# EAGLE board rat (EAGLE 6.3)
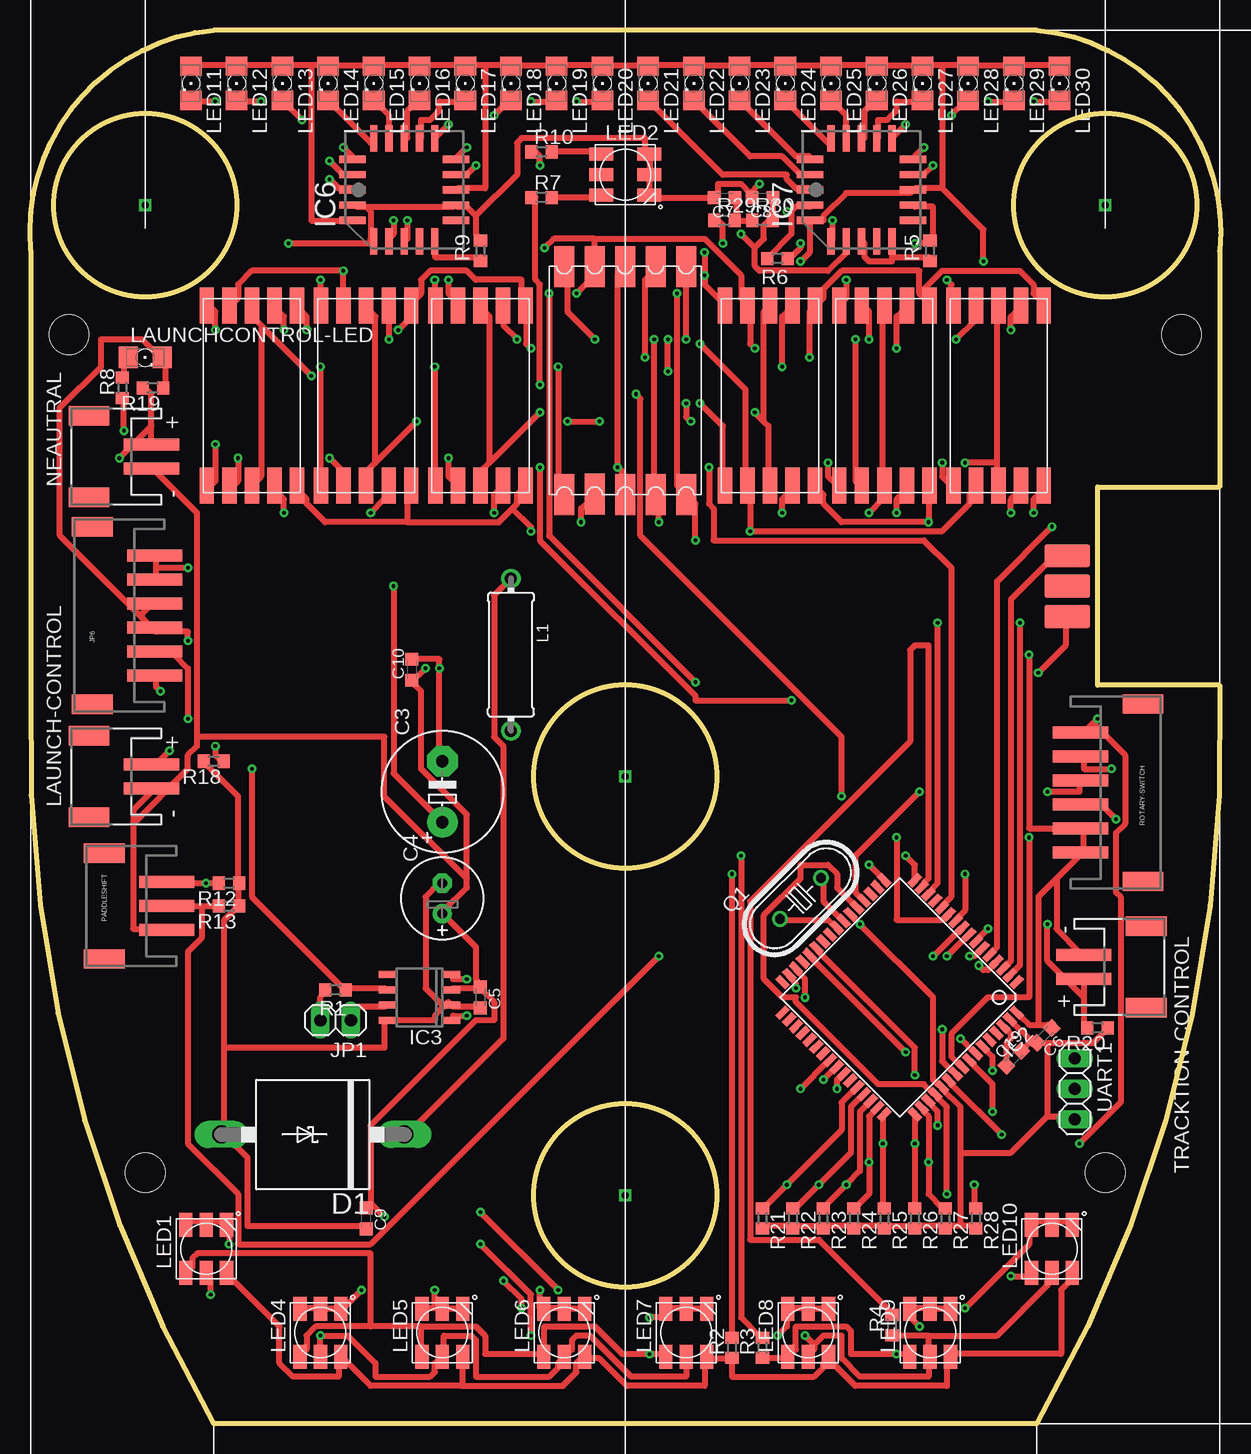
[diagram p0: board, top side]
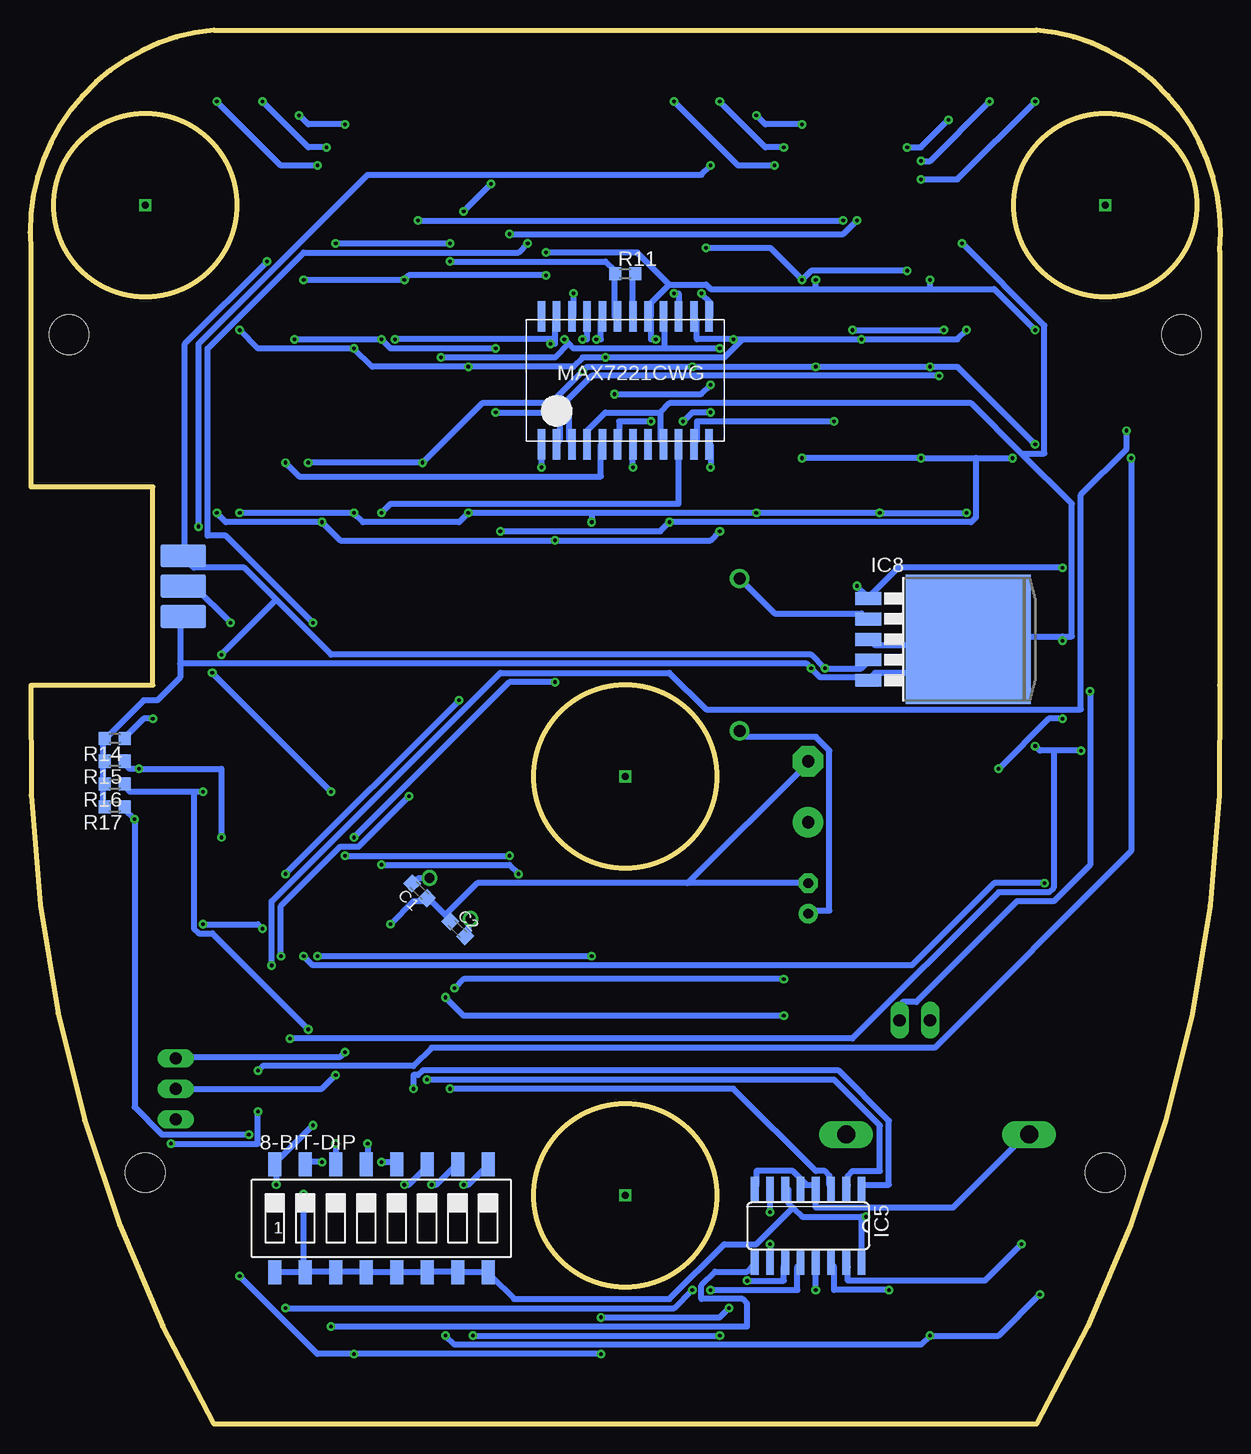
[diagram p1: board, bottom side, seen from below]

Size 99.21 x 116.2 mm. Coordinates in mm from the lower left corner, seen from the top.
Outline: 83.89,116.2 15.31,116.2 arc90 0.07,97.79 0.07,61.59 arc32 15.31,0 83.89,0 arc32 99.13,61.59 88.97,61.59 88.97,78.1 99.13,78.1 99.13,97.79 arc90 83.89,116.2
Outline: circle at 9.6,101.6 radius 7.62
Outline: circle at 89.61,101.6 radius 7.62
Outline: circle at 49.6,53.98 radius 7.62
Outline: circle at 49.6,19.05 radius 7.62
Copper layers (1*16): Top 0.035mm / dielectric 1.5mm / Bottom 0.035mm
Design rules "default *": minimum track width 19mil, minimum drill 12mil, track to track 6mil, track to pad 6mil, pad to pad 6mil, via to via 6mil, smd to smd 6mil, copper to edge 20mil, drill to drill 8mil, minimum pad ring 10mil, minimum via ring 8mil, stop-mask expansion 4mil, vias tented up to drill 0mil, thermal gap 10mil

## Footprints (pad centres in the part's own frame; a part is rotated, then mirrored left to right if it is on the bottom)
SMS-008 = smd 1.092 x 2.007: 1 -8.89,-4.496; 2 -6.35,-4.496; 3 -3.81,-4.496; 4 -1.27,-4.496; 5 1.27,-4.496; 6 3.81,-4.496; 7 6.35,-4.496; 8 8.89,-4.496; 9 8.89,4.496; 10 6.35,4.496; 11 3.81,4.496; 12 1.27,4.496; 13 -1.27,4.496; 14 -3.81,4.496; 15 -6.35,4.496; 16 -8.89,4.496
C0603K = smd 1.05 x 1.08: 1 -0.875,0; 2 0.875,0
E5-10,5 = drill 1.016 pad 2.54: + -2.54,0 | drill 1.016 pad 2.54 octagon: - 2.54,0
E2,5-7 = drill 0.813 pad 1.6: + -1.27,0 | drill 0.813 pad 1.6 octagon: - 1.27,0
P6T15 = drill 1.499 long: A 7.62,0; C -7.62,0
TQFP64 = smd 1.194 x 0.559: 1 -7.8,6; 2 -7.8,5.2; 3 -7.8,4.4; 4 -7.8,3.6; 5 -7.8,2.8; 6 -7.8,2; 7 -7.8,1.2; 8 -7.8,0.4; 9 -7.8,-0.4; 10 -7.8,-1.2; 11 -7.8,-2; 12 -7.8,-2.8; 13 -7.8,-3.6; 14 -7.8,-4.4; 15 -7.8,-5.2; 16 -7.8,-6; 33 7.8,-6; 34 7.8,-5.2; 35 7.8,-4.4; 36 7.8,-3.6; 37 7.8,-2.8; 38 7.8,-2; 39 7.8,-1.2; 40 7.8,-0.4; 41 7.8,0.4; 42 7.8,1.2; 43 7.8,2; 44 7.8,2.8; 45 7.8,3.6; 46 7.8,4.4; 47 7.8,5.2; 48 7.8,6 | smd 0.559 x 1.194: 17 -6,-7.8; 18 -5.2,-7.8; 19 -4.4,-7.8; 20 -3.6,-7.8; 21 -2.8,-7.8; 22 -2,-7.8; 23 -1.2,-7.8; 24 -0.4,-7.8; 25 0.4,-7.8; 26 1.2,-7.8; 27 2,-7.8; 28 2.8,-7.8; 29 3.6,-7.8; 30 4.4,-7.8; 31 5.2,-7.8; 32 6,-7.8; 49 6,7.8; 50 5.2,7.8; 51 4.4,7.8; 52 3.6,7.8; 53 2.8,7.8; 54 2,7.8; 55 1.2,7.8; 56 0.4,7.8; 57 -0.4,7.8; 58 -1.2,7.8; 59 -2,7.8; 60 -2.8,7.8; 61 -3.6,7.8; 62 -4.4,7.8; 63 -5.2,7.8; 64 -6,7.8
SO8 = smd 0.6 x 1.6: 1 -1.905,-2.6; 2 -0.635,-2.6; 3 0.635,-2.6; 4 1.905,-2.6; 5 1.905,2.6; 6 0.635,2.6; 7 -0.635,2.6; 8 -1.905,2.6
SO16 = smd 0.66 x 2.032: 1 -4.445,-3.073; 2 -3.175,-3.073; 3 -1.905,-3.073; 4 -0.635,-3.073; 5 0.635,-3.073; 6 1.905,-3.073; 7 3.175,-3.073; 8 4.445,-3.073; 9 4.445,3.073; 10 3.175,3.073; 11 1.905,3.073; 12 0.635,3.073; 13 -0.635,3.073; 14 -1.905,3.073; 15 -3.175,3.073; 16 -4.445,3.073
PLCC20S = smd 0.6 x 2.2: 1 0,4.3; 2 -1.27,4.3; 3 -2.54,4.3; 9 -2.54,-4.3; 10 -1.27,-4.3; 11 0,-4.3; 12 1.27,-4.3; 13 2.54,-4.3; 19 2.54,4.3; 20 1.27,4.3 | smd 2.2 x 0.6: 4 -4.3,2.54; 5 -4.3,1.27; 6 -4.3,0; 7 -4.3,-1.27; 8 -4.3,-2.54; 14 4.3,-2.54; 15 4.3,-1.27; 16 4.3,0; 17 4.3,1.27; 18 4.3,2.54
TO263-5 = smd 1.067 x 2.159: 1 -3.404,-5.791; 2 -1.702,-5.791; 3 0,-5.791; 4 1.702,-5.791; 5 3.404,-5.791 | smd 10.8 x 10.41: 6 0,2.54
1X02 = drill 1.016 long: 1 -1.27,0; 2 1.27,0
STAND-OFF = hole 3.302: 0,0
S6B_PH = smd 1 x 4.6: 1 -4.92,-2.7; 2 -2.92,-2.7; 3 -0.92,-2.7; 4 1.08,-2.7; 5 3.08,-2.7; 6 5.08,-2.7 | smd 1.6 x 3.4: NC1 -7.32,2.5; NC2 7.48,2.5
TFI0410 = drill 1 pad 1.6: 1 -6.35,0; 2 6.35,0
JST-PH-2-SMT-RA = smd 1 x 4.6: 1 1,-3.7; 2 -1,-3.7 | smd 1.6 x 3.4: NC1 -3.4,1.5; NC2 3.4,1.5
1206 = smd 1.6 x 1.803: A -1.422,0; C 1.422,0
RGBLED5050 = smd 2 x 1.1: 1 -2,1.7; 2 -2,0; 3 -2,-1.7; 4 2,-1.7; 5 2,0; 6 2,1.7
MAX7221 = smd 0.635 x 2.54: CLK 7.62,5.325; DIG0 -5.08,-5.325; DIG1 6.35,-5.325; DIG2 0,-5.325; DIG3 1.27,-5.325; DIG4 -3.81,-5.325; DIG5 5.08,-5.325; DIG6 -1.27,-5.325; DIG7 2.54,-5.325; DIN -6.35,-5.325; DOUT -6.35,5.325; GND -2.54,-5.325; GND1 3.81,-5.325; ISET 1.27,5.325; LOAD 7.62,-5.325; SEG_A 6.35,5.325; SEG_B 3.81,5.325; SEG_C -1.27,5.325; SEG_D -5.08,5.325; SEG_DP -3.81,5.325; SEG_E -2.54,5.325; SEG_F 5.08,5.325; SEG_G 2.54,5.325; VCC 0,5.325
S3B-PH = smd 1 x 4.6: 1 -2,-2.43; 2 0,-2.43; 3 2,-2.43 | smd 1.6 x 3.4: NC1 -4.4,2.77; NC2 4.4,2.77
HC49U70 = drill 0.813: 1 -2.413,0; 2 2.413,0
R0603 = smd 1 x 1.1: 1 -0.85,0; 2 0.85,0
REDSEGMENT = smd 1.2 x 3: A 1.88,7.5; B 3.76,7.5; C 1.88,-7.5; D -1.88,-7.5; DP 3.76,-7.5; E -3.76,-7.5; F -1.88,7.5; G -3.76,7.5; GND 0,-7.5; GND2 0,7.5
BIGSEVENSEGMENT = smd 1.7 x 3.4: A 2.54,9.475; B 5.08,9.475; C 2.54,-9.525; D -2.54,-9.475; DOT 5.08,-9.525; E -5.08,-9.525; F -2.54,9.475; G -5.08,9.475; GND 0,9.475; GND2 0,-9.525
ISP-HEADER = smd 3.81 x 1.93 bottom: GND 0,-2.54; MOSI 0,0; VDD 0,2.54 | smd 3.81 x 1.93: MISO 0,2.54; RST 0,-2.54; SCK 0,0
1X03 = drill 1.016 long: 1 -2.54,0; 2 0,0; 3 2.54,0

## Placement (x,y rotation side)
8-BIT-DIP  SWS008  [SMS-008]  69.92,17.14 0 bottom
C1  22pf  [C0603K]  66.75,44.45 135 bottom
C2  22pf  [C0603K]  63.57,41.27 315 bottom
C3  680 uf  [E5-10,5]  34.36,52.7 90 top
C4  220 uf  [E2,5-7]  34.36,43.81 90 top
C5  100nF  [C0603K]  37.54,35.56 270 top
C6  100nF  [C0603K]  84.53,32.38 225 top
C7  0.05uf  [C0603K]  57.86,102.23 180 top
C8  0.20uf  [C0603K]  61.03,102.23 180 top
C9  100nF  [C0603K]  28.01,17.14 270 top
C10  100nF  [C0603K]  31.82,62.86 90 top
C19  100nF  [C0603K]  81.99,30.48 45 top
D1  1n5824  [P6T15]  23.57,24.13 180 top
IC2  AT90CAN128  [TQFP64]  72.46,35.56 225 top
IC3  PCA82C250T  [SO8]  32.46,35.56 90 top
IC5  74LS138D  [SO16]  34.36,16.51 180 bottom
IC6  LM3914V  [PLCC20S]  31.19,102.87 90 top
IC7  LM3914V  [PLCC20S]  69.29,102.87 90 top
IC8  [TO263-5]  23.57,65.41 270 bottom
JP1  [1X02]  25.47,33.66 180 top
JP2  STAND-OFF  [STAND-OFF]  89.61,20.95 0 top
JP3  STAND-OFF  [STAND-OFF]  9.6,20.95 0 top
JP4  STAND-OFF  [STAND-OFF]  95.96,90.81 0 top
JP5  STAND-OFF  [STAND-OFF]  3.25,90.81 0 top
JP6  M06  [S6B_PH]  7.69,67.31 90 top
L1  33 uh  [TFI0410]  40.08,64.13 270 top
LAUNCH-CONTROL  [JST-PH-2-SMT-RA]  6.42,53.98 90 top
LAUNCHCONTROL-LED  [1206]  9.6,88.9 0 top
LED1  RGBLED5050  [RGBLED5050]  14.68,14.61 90 top
LED2  RGBLED5050  [RGBLED5050]  49.6,104.14 0 top
LED4  RGBLED5050  [RGBLED5050]  24.2,7.62 90 top
LED5  RGBLED5050  [RGBLED5050]  34.36,7.62 90 top
LED6  RGBLED5050  [RGBLED5050]  44.52,7.62 90 top
LED7  RGBLED5050  [RGBLED5050]  54.68,7.62 90 top
LED8  RGBLED5050  [RGBLED5050]  64.84,7.62 90 top
LED9  RGBLED5050  [RGBLED5050]  75,7.62 90 top
LED10  RGBLED5050  [RGBLED5050]  85.16,14.61 90 top
LED11  GREEN  [1206]  13.41,111.76 270 top
LED12  GREEN  [1206]  17.22,111.76 270 top
LED13  GREEN  [1206]  21.03,111.76 270 top
LED14  GREEN  [1206]  24.84,111.76 270 top
LED15  GREEN  [1206]  28.65,111.76 270 top
LED16  GREEN  [1206]  32.46,111.76 270 top
LED17  GREEN  [1206]  36.27,111.76 270 top
LED18  GREEN  [1206]  40.08,111.76 270 top
LED19  GREEN  [1206]  43.89,111.76 270 top
LED20  GREEN  [1206]  47.7,111.76 270 top
LED21  GREEN  [1206]  51.51,111.76 270 top
LED22  GREEN  [1206]  55.32,111.76 270 top
LED23  GREEN  [1206]  59.13,111.76 270 top
LED24  GREEN  [1206]  62.94,111.76 270 top
LED25  GREEN  [1206]  66.75,111.76 270 top
LED26  GREEN  [1206]  70.56,111.76 270 top
LED27  GREEN  [1206]  74.37,111.76 270 top
LED28  GREEN  [1206]  78.18,111.76 270 top
LED29  GREEN  [1206]  81.99,111.76 270 top
LED30  GREEN  [1206]  85.8,111.76 270 top
MAX7221  MAX7221-SMD  [MAX7221]  50.24,87 0 bottom
NEAUTRAL  [JST-PH-2-SMT-RA]  6.42,80.65 90 top
PADDLESHIFT  [S3B-PH]  8.96,43.18 90 top
Q1  12 MHz  [HC49U70]  64.21,43.81 45 top
R1  120  [R0603]  25.47,36.2 180 top
R2  200  [R0603]  58.49,6.35 90 top
R3  200  [R0603]  61.03,6.35 90 top
R4  200  [R0603]  71.83,8.25 90 top
R5  2k2  [R0603]  75,97.79 90 top
R6  3k3  [R0603]  62.3,97.16 180 top
R7  200  [R0603]  42.62,102.23 0 top
R8  200  [R0603]  7.69,86.36 90 top
R9  1k  [R0603]  37.54,97.79 90 top
R10  200  [R0603]  42.62,106.05 0 top
R11  9.5k  [R0603]  49.6,95.89 0 bottom
R12  200  [R0603]  16.58,45.09 180 top
R13  200  [R0603]  16.58,43.18 180 top
R14  200  [R0603]  92.15,57.15 180 bottom
R15  200  [R0603]  92.15,55.25 180 bottom
R16  200  [R0603]  92.15,53.34 180 bottom
R17  200  [R0603]  92.15,51.44 180 bottom
R18  200  [R0603]  15.31,55.25 180 top
R19  200  [R0603]  10.23,86.36 180 top
R20  200  [R0603]  88.97,33.02 180 top
R21  200  [R0603]  61.03,17.14 270 top
R22  200  [R0603]  63.57,17.14 270 top
R23  200  [R0603]  66.11,17.14 270 top
R24  200  [R0603]  68.65,17.14 270 top
R25  200  [R0603]  71.19,17.14 270 top
R26  200  [R0603]  73.73,17.14 270 top
R27  200  [R0603]  76.27,17.14 270 top
R28  200  [R0603]  78.81,17.14 270 top
R29  1k  [R0603]  57.86,100.33 0 top
R30  4k  [R0603]  61.03,100.33 0 top
ROTARY-SWITCH  [S6B_PH]  90.24,52.7 270 top
TRACKTION-CONTROL  [JST-PH-2-SMT-RA]  91.51,38.1 270 top
U$2  REDSEVENSEGMENT  [REDSEGMENT]  18.49,85.72 0 top
U$3  REDSEVENSEGMENT  [REDSEGMENT]  28.01,85.72 0 top
U$4  REDSEVENSEGMENT  [REDSEGMENT]  37.54,85.72 0 top
U$5  BIGSEVENSEGMENT  [BIGSEVENSEGMENT]  49.6,87 0 top
U$6  REDSEVENSEGMENT  [REDSEGMENT]  61.67,85.72 0 top
U$7  REDSEVENSEGMENT  [REDSEGMENT]  71.19,85.72 0 top
U$8  REDSEVENSEGMENT  [REDSEGMENT]  80.72,85.72 0 top
U$9  ISP-HEADER  [ISP-HEADER]  86.43,69.85 0 top
UART1  [1X03]  87.07,27.94 270 top

## Library data of the parts
8-BIT-DIP = smd-special
C1-C10 C19 L1 R2-R4 R7 R8 R10-R30 = rcl
D1 = diode
IC2 = atmel; MPN: ATMEGA128-16AU; OC_FARNELL: 9171118; OC_NEWARK: 95K7364
IC3 = micro-philips; OC_FARNELL: 1085275; OC_NEWARK: unknown
IC5 = 74xx-us
IC6 IC7 = national-semiconductor
IC8 = linear
JP1 UART1 = pinhead
JP2-JP5 = SparkFun
JP6 PADDLESHIFT ROTARY-SWITCH = unicorn_v2
LAUNCH-CONTROL LED1 LED2 LED4-LED10 NEAUTRAL TRACKTION-CONTROL = adafruit
LAUNCHCONTROL-LED LED11-LED30 = led; OSRAM-LGN971: GREEN
MAX7221 = max7221-smd
Q1 = crystal; OC_FARNELL: unknown; OC_NEWARK: unknown
R1 R5 R6 R9 = resistor
U$2-U$8 = red_segment
U$9 = ISP-Header

## Nets
7-SEGMENT-CLK: IC2.11 MAX7221.CLK
7-SEGMENT-DATA: IC2.12 MAX7221.DIN
7-SEGMENT-LOAD: IC2.10 MAX7221.LOAD
+5V: 8-BIT-DIP.1 8-BIT-DIP.2 8-BIT-DIP.3 8-BIT-DIP.4 8-BIT-DIP.5 8-BIT-DIP.6 8-BIT-DIP.7 8-BIT-DIP.8 C4.+ C5.1 C6.1 C9.1 C10.1 IC2.21 IC2.52 IC2.64 IC3.3 IC5.6 IC5.16 IC6.3 IC6.11 IC7.3 IC7.11 IC8.4 L1.2 LAUNCH-CONTROL.2 LED11.A LED12.A LED13.A LED14.A LED15.A LED16.A LED17.A LED18.A LED19.A LED20.A LED21.A LED22.A LED23.A LED24.A LED25.A LED26.A LED27.A LED28.A LED29.A LED30.A MAX7221.VCC NEAUTRAL.2 PADDLESHIFT.1 R11.1 ROTARY-SWITCH.5 ROTARY-SWITCH.6 TRACKTION-CONTROL.2 U$9.VDD
CANJUMP1: IC3.7 JP1.1 JP6.1
CANJUMP2: JP1.2 R1.2
DIP-SWITCH-1: 8-BIT-DIP.16 IC2.51 R28.1
DIP-SWITCH-2: 8-BIT-DIP.15 IC2.50 R27.1
DIP-SWITCH-3: 8-BIT-DIP.14 IC2.49 R26.1
DIP-SWITCH-4: 8-BIT-DIP.13 IC2.48 R25.1
DIP-SWITCH-5: 8-BIT-DIP.12 IC2.47 R24.1
DIP-SWITCH-6: 8-BIT-DIP.11 IC2.46 R23.1
DIP-SWITCH-7: 8-BIT-DIP.10 IC2.45 R22.1
DIP-SWITCH-8: 8-BIT-DIP.9 IC2.44 R21.1
MISO/TXD0: IC2.3 U$9.MISO
MOSI/RXD0: IC2.2 U$9.MOSI
N$1: C2.2 IC2.24 Q1.1
N$2: C1.2 IC2.23 Q1.2
N$3: MAX7221.SEG_A U$2.A U$3.A U$4.A U$5.A U$6.A U$7.A U$8.A
N$6: MAX7221.SEG_B U$2.B U$3.B U$4.B U$5.B U$6.B U$7.B U$8.B
N$8: MAX7221.SEG_C U$2.C U$3.C U$4.C U$5.C U$6.C U$7.C U$8.C
N$10: C19.1 IC2.62
N$12: MAX7221.SEG_D U$2.D U$3.D U$4.D U$5.D U$6.D U$7.D U$8.D
N$13: MAX7221.SEG_E U$2.E U$3.E U$4.E U$5.E U$6.E U$7.E U$8.E
N$14: MAX7221.SEG_F U$2.F U$3.F U$4.F U$5.F U$6.F U$7.F U$8.F
N$15: MAX7221.SEG_G U$2.G U$3.G U$4.G U$5.G U$6.G U$7.G U$8.G
N$16: MAX7221.DIG0 U$2.GND U$2.GND2
N$17: MAX7221.DIG1 U$3.GND U$3.GND2
N$18: MAX7221.DIG2 U$4.GND U$4.GND2
N$19: MAX7221.DIG3 U$5.GND U$5.GND2
N$20: MAX7221.DIG4 U$6.GND U$6.GND2
N$21: MAX7221.DIG5 U$7.GND U$7.GND2
N$22: MAX7221.DIG6 U$8.GND U$8.GND2
N$25: MAX7221.SEG_DP U$2.DP U$3.DP U$4.DP U$5.DOT U$6.DP U$7.DP U$8.DP
N$26: C7.1 R29.2 R30.1
N$27: MAX7221.ISET R11.2
N$29: IC2.59 NEAUTRAL.1 R19.2
N$30: LED1.2 LED4.2 LED5.2 LED6.2 LED7.2 LED8.2 LED9.2 LED10.2 R4.1
N$31: LED1.1 LED4.1 LED5.1 LED6.1 LED7.1 LED8.1 LED9.1 LED10.1 R3.1
N$32: LED1.3 LED4.3 LED5.3 LED6.3 LED7.3 LED8.3 LED9.3 LED10.3 R2.1
N$33: IC5.15 LED1.4 LED1.5 LED1.6
N$34: IC5.14 LED4.4 LED4.5 LED4.6
N$35: IC5.13 LED5.4 LED5.5 LED5.6
N$36: IC5.12 LED6.4 LED6.5 LED6.6
N$37: IC5.11 LED7.4 LED7.5 LED7.6
N$38: IC5.10 LED8.4 LED8.5 LED8.6
N$39: IC5.9 LED9.4 LED9.5 LED9.6
N$40: IC5.7 LED10.4 LED10.5 LED10.6
N$45: D1.C IC8.2 L1.1
N$48: IC6.1 LED11.C
N$49: IC6.20 LED12.C
N$50: IC6.19 LED13.C
N$51: IC3.6 JP6.2 R1.1
N$52: IC6.18 LED14.C
N$53: IC6.17 LED15.C
N$54: IC6.16 LED16.C
N$55: IC6.15 LED17.C
N$56: IC6.14 LED18.C
N$57: IC6.13 LED19.C
N$58: IC6.12 LED20.C
N$59: IC7.1 LED21.C
N$60: IC7.20 LED22.C
N$61: IC7.19 LED23.C
N$62: IC7.18 LED24.C
N$63: IC7.17 LED25.C
N$64: IC7.16 LED26.C
N$65: IC7.15 LED27.C
N$66: IC7.14 LED28.C
N$67: IC7.13 LED29.C
N$68: IC7.12 LED30.C
N$71: IC2.58 LAUNCH-CONTROL.1 R18.1
N$72: IC6.6 IC7.4
N$74: IC7.6 IC7.8 R5.1
N$75: IC7.10 R5.2 R6.1
N$76: IC6.8 R9.1
N$80: LED2.3 R7.2
N$87: LED2.1 R10.2
N$88: LAUNCHCONTROL-LED.A R8.2
N$89: IC2.4 R8.1
PADDLE-DOWN: IC2.8 PADDLESHIFT.3 R12.2
PADDLE-UP: IC2.9 PADDLESHIFT.2 R13.2
PE: C1.1 C2.1 C3.- C4.- C5.2 C6.2 C7.2 C8.2 C9.2 C10.2 C19.2 D1.A IC2.22 IC2.53 IC2.63 IC3.2 IC3.8 IC5.4 IC5.5 IC5.8 IC6.2 IC6.4 IC6.10 IC7.2 IC8.3 IC8.5 IC8.6 JP6.3 JP6.4 LAUNCHCONTROL-LED.C LED2.4 LED2.5 LED2.6 MAX7221.GND MAX7221.GND1 R6.2 R9.2 R12.1 R13.1 R14.2 R15.2 R16.2 R17.2 R18.2 R19.1 R20.1 R21.2 R22.2 R23.2 R24.2 R25.2 R26.2 R27.2 R28.2 U$9.GND UART1.3
RESET: IC2.20 U$9.RST
RGB-BLUE-ON/OFF: IC2.17 R2.2
RGB-GREEN-ON/OFF: IC2.16 R3.2
RGB-RED-ON/OFF: IC2.15 R4.2
RGB-STATUS-LED-A: IC2.42 IC5.1
RGB-STATUS-LED-B: IC2.41 IC5.2
RGB-STATUS-LED-C: IC2.40 IC5.3
RPM-PWM: C8.1 IC6.5 IC7.5 R30.2
RPM-PWM-OUT: IC2.14 R29.1
RS-BINARY-1: IC2.54 R17.1 ROTARY-SWITCH.4
RS-BINARY-2: IC2.55 R16.1 ROTARY-SWITCH.3
RS-BINARY-3: IC2.56 R15.1 ROTARY-SWITCH.2
RS-BINARY-4: IC2.57 R14.1 ROTARY-SWITCH.1
RXCAN: IC2.31 IC3.4
RXD1: IC2.27 UART1.2
SCK: U$9.SCK
SCL: IC2.25
SDA: IC2.26
SHIFT-LIGHT-BLUE: IC2.6 R7.1
SHIFT-LIGHT-GREEN: IC2.5 R10.1
TC-TEMP-ON/OFF: IC2.7 R20.2 TRACKTION-CONTROL.1
TXCAN: IC2.30 IC3.1
TXD1: IC2.28 UART1.1
VCC: C3.+ IC8.1 JP6.5 JP6.6

## Tracks (layer width: path | path; a pad name or v marks a point on that pad's centre or on a via)
7-SEGMENT-CLK  (via drill 0.3)
  Top 0.483: v72.21,48.89 72.21,42.04 76.02,42.04 76.4,42.42 IC2.11 | v55.45,61.85 43.25,74.04 v43.25,94.23
  Bottom 0.483: v72.21,48.89 59.26,61.85 v55.45,61.85 | v43.25,94.23 42.49,93.47 42.49,92.33 MAX7221.CLK
7-SEGMENT-DATA  (via drill 0.3)
  Top 0.483: v56.59,79.76 56.59,76.71 56.97,76.33 56.97,73.66 74.5,73.66 76.78,71.37 76.78,43.94 76.02,43.18 IC2.12
  Bottom 0.483: MAX7221.DIN v56.59,79.76
7-SEGMENT-LOAD  (via drill 0.3)
  Top 0.483: v77.93,45.85 77.93,42.8 77.16,42.04 IC2.10 | v63.45,60.33 55.45,60.33 55.45,60.71 42.49,73.66 v42.49,79.76
  Bottom 0.483: v63.45,60.33 v77.93,45.85 | v42.49,79.76 42.49,81.66 MAX7221.LOAD
+5V  (via drill 0.3)
  Top 0.483: v64.21,96.9 64.97,97.66 64.97,100.33 IC7.3 66.11,100.33 66.11,100.71 68.02,102.62 73.35,102.62 IC7.11 73.73,103 76.02,103 | LED11.A 13.54,113.28 16.97,113.28 LED12.A 17.35,113.28 20.78,113.28 LED13.A 21.16,113.28 23.44,113.28 | 23.44,113.28 24.59,113.28 LED14.A 24.97,113.28 28.4,113.28 LED15.A 28.78,113.28 32.21,113.28 LED16.A 32.59,113.28 36.02,113.28 LED17.A 36.4,113.28 37.92,113.28 | IC6.3 23.44,100.33 23.44,113.28 | LED30.A 85.55,113.28 82.12,113.28 LED29.A 81.74,113.28 78.31,113.28 LED28.A 77.93,113.28 76.02,113.28 | 76.02,113.28 74.5,113.28 LED27.A 74.12,113.28 70.69,113.28 LED26.A 70.31,113.28 66.88,113.28 LED25.A 66.5,113.28 63.07,113.28 LED24.A 62.69,113.28 59.26,113.28 LED23.A 58.88,113.28 55.45,113.28 LED22.A 55.07,113.28 51.64,113.28 LED21.A 51.26,113.28 47.83,113.28 LED20.A 47.45,113.28 44.02,113.28 LED19.A 43.64,113.28 40.21,113.28 LED18.A 39.83,113.28 37.92,113.28 | 37.92,113.28 37.92,103 35.63,103 IC6.11 | 76.02,113.28 76.02,103 | IC2.21 68.78,43.18 67.26,44.7 67.26,45.85 66.5,46.61 64.21,46.61 64.21,45.47 61.16,42.42 61.16,37.08 62.69,35.56 63.83,35.56 63.83,35.18 70.69,28.32 74.5,28.32 75.26,27.56 IC2.52 75.64,27.18 76.4,26.42 v76.4,19.18 | 8.58,50.04 8.58,51.18 10.11,52.7 LAUNCH-CONTROL.2 | 8.58,50.04 8.58,41.27 11.25,41.27 PADDLESHIFT.1 | 13.92,57.28 13.92,56.52 13.16,55.75 13.16,54.61 8.58,50.04 | 13.92,57.28 13.92,75.95 10.49,79.38 NEAUTRAL.2 | 28.4,18.41 28.01,18.03 C9.1 28.4,18.41 | 28.4,18.41 28.4,24.89 37.16,33.66 38.68,33.66 38.68,35.18 37.54,36.32 | 37.54,36.32 35.25,36.32 IC3.3 | 37.54,36.32 C5.1 37.54,36.7 37.16,37.08 37.16,39.75 C4.+ 34.49,42.8 36.4,44.7 36.4,45.47
  Top 0.483: 84.02,33.27 83.26,33.27 82.5,34.04 IC2.64 | 84.02,33.27 84.78,33.27 C6.1 | 84.02,33.27 84.02,43.94 85.55,45.47 | 85.55,45.47 87.45,47.37 ROTARY-SWITCH.6 87.83,47.75 87.83,49.28 ROTARY-SWITCH.5 87.45,49.66 83.26,49.66 v83.26,64.13 | 85.55,45.47 85.55,41.27 87.45,39.37 TRACKTION-CONTROL.2 | 31.82,61.85 32.59,61.09 32.59,54.61 36.4,50.8 36.4,45.47 | 31.82,61.85 v32.97,62.99 | 31.82,61.85 C10.1 | 13.92,57.28 29.54,57.28 29.54,52.32 36.4,45.47 | 28.4,18.41 v29.54,17.27 | 76.02,103 79.45,99.57 v79.45,96.9
  Bottom 0.483: MAX7221.VCC 50.49,92.33 50.49,95.76 R11.1 50.49,96.14 51.26,96.9 v64.21,96.9 | 29.92,17.27 IC5.16 | 29.92,17.27 34.87,17.27 35.63,18.03 | 35.63,18.03 36.02,18.41 36.02,19.56 IC5.6 | 66.11,12.7 63.83,12.7 8-BIT-DIP.7 63.45,12.7 61.16,12.7 8-BIT-DIP.8 60.78,12.32 58.88,10.41 45.92,10.41 41.35,14.99 38.68,14.99 35.63,18.03 | 76.4,12.7 78.69,12.7 8-BIT-DIP.1 | 73.73,12.7 71.45,12.7 8-BIT-DIP.4 71.07,12.7 68.78,12.7 8-BIT-DIP.5 68.4,12.7 66.11,12.7 | 73.73,12.7 76.02,12.7 8-BIT-DIP.2 76.4,12.7 | 73.73,12.7 8-BIT-DIP.3 | 66.11,12.7 8-BIT-DIP.6 | 76.4,12.7 v76.4,19.18 | IC8.4 29.54,63.37 29.92,62.99 v32.97,62.99 34.11,64.13 74.12,64.13 78.69,68.71 | L1.2 39.83,57.66 39.44,57.28 33.73,57.28 32.59,56.13 32.59,42.8 34.11,42.8 C4.+ | 78.69,68.71 81.35,71.37 85.55,71.37 86.31,72.14 U$9.VDD 86.31,72.52 86.31,90.04 v79.45,96.9 | 78.69,68.71 v83.26,64.13 | v29.54,17.27 29.92,17.27
CANJUMP1  (via drill 0.3)
  Top 0.483: IC3.7 29.54,34.8 26.87,34.8 26.87,33.66 JP1.1 | v10.87,61.09 10.49,61.47 10.49,62.23 JP6.1
  Bottom 0.483: v10.87,61.09 10.87,46.61 13.92,43.56 16.97,43.56 25.35,35.18 26.49,35.18 26.49,33.66 JP1.1
CANJUMP2
  Top 0.483: JP1.2 24.2,35.56 24.59,35.94 R1.2
DIP-SWITCH-1  (via drill 0.3)
  Top 0.483: v78.69,19.94 78.69,18.03 R28.1 | v75.64,24.89 75.64,26.04 74.88,26.8 IC2.51
  Bottom 0.483: v78.69,19.94 78.69,21.46 8-BIT-DIP.16 78.69,21.84 v75.64,24.89
DIP-SWITCH-2  (via drill 0.3)
  Top 0.483: R27.1 76.02,18.03 74.88,19.18 v74.88,21.84 74.88,25.65 74.5,26.04 IC2.50
  Bottom 0.483: v74.88,21.84 76.02,21.84 8-BIT-DIP.15
DIP-SWITCH-3  (via drill 0.3)
  Top 0.483: R26.1 v73.73,23.37 73.73,25.65 IC2.49
  Bottom 0.483: v73.73,23.37 8-BIT-DIP.14
DIP-SWITCH-4  (via drill 0.3)
  Top 0.483: R25.1 71.07,18.03 v71.07,23.37 71.07,25.65 IC2.48
  Bottom 0.483: v71.07,23.37 71.07,21.84 8-BIT-DIP.13
DIP-SWITCH-5  (via drill 0.3)
  Top 0.483: R24.1 68.78,18.03 69.92,19.18 v69.92,21.84 69.92,25.65 70.31,26.04 IC2.47
  Bottom 0.483: v69.92,21.84 68.78,21.84 8-BIT-DIP.12
DIP-SWITCH-6  (via drill 0.3)
  Top 0.483: R23.1 66.11,18.03 v68.02,19.94 69.16,21.08 69.16,26.04 69.92,26.8 IC2.46
  Bottom 0.483: v68.02,19.94 67.64,19.94 66.11,21.46 8-BIT-DIP.11
DIP-SWITCH-7  (via drill 0.3)
  Top 0.483: R22.1 63.83,18.03 v65.73,19.94 68.4,22.61 68.4,26.42 69.16,27.18 IC2.45
  Bottom 0.483: v65.73,19.94 65.35,19.94 63.83,21.46 8-BIT-DIP.10
DIP-SWITCH-8  (via drill 0.3)
  Top 0.483: R21.1 61.16,18.03 v63.07,19.94 67.64,24.51 67.64,26.8 68.78,27.94 IC2.44
  Bottom 0.483: v63.07,19.94 62.69,19.94 61.16,21.46 8-BIT-DIP.9
MISO/TXD0
  Top 0.483: IC2.3 81.35,38.23 81.74,38.61 81.74,68.71 85.16,72.14 86.31,72.14 U$9.MISO
MOSI/RXD0  (via drill 0.3)
  Top 0.483: v82.5,66.8 82.5,38.23 81.74,37.47 IC2.2
  Bottom 0.483: v82.5,66.8 85.55,69.85 U$9.MOSI
N$1
  Top 0.483: IC2.24 66.88,41.66 66.5,42.04 62.69,42.04 Q1.1
  Bottom 0.483: C2.2 62.69,40.89 62.69,42.04 Q1.1
N$2
  Top 0.483: IC2.23 67.64,42.04 66.11,43.56 66.11,45.47 Q1.2
  Bottom 0.483: C1.2 67.26,45.09 66.88,45.47 66.11,45.47 Q1.2
N$3  (via drill 0.3)
  Top 0.483: v40.59,90.42 39.44,91.57 39.44,93.09 U$4.A | v21.16,91.19 21.16,92.33 20.39,93.09 U$2.A | v29.92,90.42 29.92,93.09 U$3.A | v62.69,88.14 62.69,92.33 63.45,93.09 U$6.A | v72.21,89.66 72.21,92.33 72.97,93.09 U$7.A | v81.74,91.19 81.74,92.33 82.5,93.09 U$8.A | v51.26,88.9 51.26,95.38 52.02,96.14 U$5.A
  Bottom 0.483: MAX7221.SEG_A 43.64,91.95 43.64,90.42 v40.59,90.42 39.83,90.42 | v21.16,91.19 21.92,90.42 v29.92,90.42 39.83,90.42 | 39.83,90.42 41.35,88.9 v51.26,88.9 53.16,88.9 53.92,88.14 v62.69,88.14 70.69,88.14 v72.21,89.66 80.21,89.66 v81.74,91.19
N$6  (via drill 0.3)
  Top 0.483: 74.12,94.23 74.12,96.14 67.64,96.14 66.11,94.62 66.11,93.85 65.73,93.47 U$6.B 65.35,93.09 64.97,92.71 v64.97,88.9 | 74.12,94.23 74.88,93.47 U$7.B | 74.12,94.23 76.02,96.14 82.5,96.14 83.64,95 83.64,94.23 84.4,93.47 U$8.B | v23.06,91.19 23.06,92.33 22.3,93.09 U$2.B | v30.68,91.19 31.44,91.95 31.44,93.09 U$3.B 31.82,93.47 32.59,94.23 32.59,95.38 33.35,96.14 36.4,96.14 37.16,95.38 40.97,95.38 40.97,93.47 U$4.B 41.35,93.09 41.35,90.04 v41.73,89.66 | v54.68,90.42 U$5.B
  Bottom 0.483: v30.68,91.19 v23.06,91.19 | 46.3,89.66 46.3,91.95 MAX7221.SEG_B | v41.73,89.66 46.3,89.66 | 54.3,90.04 53.92,89.66 46.3,89.66 | 54.3,90.04 v54.68,90.42 | v64.97,88.9 55.45,88.9 54.3,90.04
N$8  (via drill 0.3)
  Top 0.483: v52.02,90.42 52.02,77.47 U$5.C 52.4,77.47 v52.4,75.18 | v21.16,75.95 21.16,77.09 20.39,77.85 U$2.C | v28.4,75.95 29.54,77.09 29.54,77.85 U$3.C | v38.68,75.95 38.68,77.47 39.06,77.85 U$4.C | v62.69,75.95 62.69,77.09 63.45,77.85 U$6.C | v72.21,75.95 72.21,77.09 72.97,77.85 U$7.C | v81.74,75.95 81.74,77.09 82.5,77.85 U$8.C
  Bottom 0.483: v52.02,90.42 51.64,90.42 51.64,91.95 MAX7221.SEG_C | v21.16,75.95 v28.4,75.95 v38.68,75.95 52.4,75.95 | 52.4,75.95 v62.69,75.95 63.45,75.18 71.45,75.18 v72.21,75.95 v81.74,75.95 | 52.4,75.95 v52.4,75.18
N$10
  Top 0.483: C19.1 81.35,30.23 81.35,31.75 81.74,32.13 81.74,32.51 81.35,32.89 IC2.62
N$12  (via drill 0.3)
  Top 0.483: v17.35,80.52 17.35,78.61 16.97,78.23 U$2.D | v24.97,80.52 26.11,79.38 26.11,78.23 U$3.D | v34.87,80.52 34.87,78.99 35.63,78.23 U$4.D | v45.92,75.18 45.92,76.33 47.06,77.47 U$5.D | v55.83,90.04 59.64,86.23 59.64,78.23 U$6.D 60.02,77.85 v60.02,74.42 76.02,74.42 78.31,76.71 78.31,77.47 78.69,77.85 U$8.D | v68.78,90.42 68.78,78.61 69.16,78.23 U$7.D
  Bottom 0.483: 20.39,80.52 v24.97,80.52 v34.87,80.52 | 20.39,80.52 v17.35,80.52 | 20.39,80.52 20.39,75.56 20.78,75.18 v45.92,75.18 46.68,74.42 v60.02,74.42 | 55.45,90.42 55.45,90.04 v55.83,90.04 | 55.45,90.42 55.45,91.95 MAX7221.SEG_D | 55.45,90.42 v68.78,90.42
N$13  (via drill 0.3)
  Top 0.483: v53.16,87.76 v53.16,90.42 | v55.83,85.09 57.73,83.19 57.73,78.23 U$6.E | v15.44,81.66 15.44,78.61 15.06,78.23 U$2.E | v24.2,88.14 24.2,78.23 U$3.E | v33.73,88.14 33.73,78.23 U$4.E | v66.5,80.14 66.5,78.99 67.26,78.23 U$7.E | v76.02,80.14 76.02,78.99 76.78,78.23 U$8.E | v44.02,88.14 44.02,77.85 44.4,77.47 U$5.E
  Bottom 0.483: MAX7221.SEG_E 52.78,90.42 v53.16,90.42 | v15.44,81.66 21.92,88.14 v24.2,88.14 v33.73,88.14 v44.02,88.14 52.78,88.14 v53.16,87.76 v55.83,85.09 61.54,85.09 v66.5,80.14 v76.02,80.14
N$14  (via drill 0.3)
  Top 0.483: U$2.F 16.97,93.47 17.35,93.85 17.35,95 18.49,96.14 v26.11,96.14 26.11,93.47 U$3.F | v34.87,95.38 34.87,94.23 35.63,93.47 U$4.F | v69.92,90.42 69.92,92.71 69.54,93.09 U$7.F | v77.16,90.42 78.69,91.95 78.69,93.09 U$8.F | v45.54,94.23 47.06,95.76 U$5.F 47.06,98.81 | 47.06,98.81 56.21,98.81 59.26,95.76 59.26,93.85 59.64,93.47 U$6.F 60.02,93.09 60.02,90.04 v60.4,89.66 | v42.87,98.04 43.64,98.81 47.06,98.81
  Bottom 0.483: v26.11,96.14 34.11,96.14 v34.87,95.38 37.54,98.04 v42.87,98.04 | v77.16,90.42 v69.92,90.42 69.16,89.66 v60.4,89.66 | MAX7221.SEG_F 45.16,94.23 v45.54,94.23
N$15  (via drill 0.3)
  Top 0.483: v68.02,95.38 68.02,93.85 67.64,93.47 U$7.G | v76.4,95.38 76.78,95 76.78,93.47 U$8.G | v47.06,90.42 44.78,92.71 44.78,96.14 U$5.G | v15.44,91.19 15.44,92.71 15.06,93.09 U$2.G | v24.2,95.38 24.2,93.47 U$3.G | v33.73,95.38 33.73,93.47 U$4.G | v56.21,97.66 v56.21,95.76 56.21,95 57.73,93.47 U$6.G
  Bottom 0.483: v76.4,95.38 v68.02,95.38 67.64,95.76 v56.21,95.76 | v47.06,90.42 47.45,90.42 47.45,91.95 MAX7221.SEG_G 47.45,92.33 47.45,93.47 45.92,95 | v15.44,91.19 18.87,94.62 24.2,94.62 | 33.73,94.62 42.49,94.62 42.87,95 45.92,95 | 33.73,94.62 24.2,94.62 | 24.2,94.62 v24.2,95.38 | 33.73,94.62 v33.73,95.38 | v56.21,97.66 48.59,97.66 45.92,95
N$16  (via drill 0.3)
  Top 0.483: v55.07,83.57 54.68,83.95 v54.68,85.09 | 19.25,91.57 18.49,92.33 U$2.GND2 | 19.25,91.57 v23.44,87.38 | 19.25,91.57 19.25,78.99 U$2.GND
  Bottom 0.483: v55.07,83.57 55.07,82.04 MAX7221.DIG0 | v54.68,85.09 52.4,87.38 v23.44,87.38
N$17  (via drill 0.3)
  Top 0.483: 28.78,80.14 28.01,79.38 U$3.GND | 28.78,80.14 v32.21,83.57 | 28.78,80.14 28.78,92.33 28.01,93.09 U$3.GND2
  Bottom 0.483: v32.21,83.57 43.64,83.57 43.64,82.04 MAX7221.DIG1
N$18  (via drill 0.3)
  Top 0.483: v44.78,83.57 v47.45,83.57 | 38.3,80.14 37.54,79.38 U$4.GND | 38.3,80.14 v42.49,84.33 | 38.3,80.14 38.3,92.33 37.54,93.09 U$4.GND2
  Bottom 0.483: v47.45,83.57 50.11,83.57 50.11,82.04 MAX7221.DIG2 | v44.78,83.57 44.02,84.33 v42.49,84.33
N$19  (via drill 0.3)
  Top 0.483: U$5.GND2 49.35,77.47 49.35,79.38 v48.97,79.76 48.97,95.76 49.35,96.14 U$5.GND
  Bottom 0.483: v48.97,79.76 MAX7221.DIG3
N$20  (via drill 0.3)
  Top 0.483: 61.16,83.57 61.54,83.19 61.54,78.23 U$6.GND | 61.16,83.57 v60.4,84.33 | 61.16,83.57 61.16,92.71 61.54,93.09 U$6.GND2
  Bottom 0.483: v60.4,84.33 54.3,84.33 54.3,82.04 MAX7221.DIG4
N$21  (via drill 0.3)
  Top 0.483: v69.92,75.95 71.07,77.09 71.07,77.85 U$7.GND 71.07,78.23 71.07,93.09 U$7.GND2
  Bottom 0.483: MAX7221.DIG5 45.16,76.71 69.16,76.71 v69.92,75.95
N$22  (via drill 0.3)
  Top 0.483: 80.59,80.14 v77.93,80.14 | 80.59,80.14 80.59,78.23 U$8.GND | 80.59,80.14 80.59,93.09 U$8.GND2
  Bottom 0.483: v77.93,80.14 76.78,78.99 51.64,78.99 51.64,81.66 MAX7221.DIG6
N$25  (via drill 0.3)
  Top 0.483: 31.44,75.18 24.59,75.18 23.06,76.71 23.06,77.09 22.3,77.85 U$2.DP | 31.44,75.18 31.44,77.85 U$3.DP | 40.21,76.33 39.06,75.18 31.44,75.18 | 40.21,76.33 40.59,76.71 40.59,77.47 40.97,77.85 U$4.DP | v53.92,94.23 53.92,78.23 U$5.DOT 55.45,76.71 v55.45,73.66 | U$6.DP 65.73,77.85 66.11,77.47 66.11,76.71 67.64,75.18 v74.88,75.18 74.88,77.85 U$7.DP | v83.64,75.95 83.64,77.09 84.4,77.85 U$8.DP | 40.21,76.33 41.73,74.8 v41.73,74.42
  Bottom 0.483: v53.92,94.23 53.92,92.33 MAX7221.SEG_DP | v83.64,75.95 82.88,75.18 v74.88,75.18 73.35,73.66 v55.45,73.66 42.49,73.66 v41.73,74.42
N$26
  Top 0.483: 58.88,100.33 58.88,102.23 C7.1 | 58.88,100.33 R30.1 | 58.88,100.33 R29.2
N$27
  Bottom 0.483: MAX7221.ISET 48.97,95.76 R11.2
N$29  (via drill 0.3)
  Top 0.483: 10.11,83.19 10.11,81.66 NEAUTRAL.1 | 10.11,83.19 10.11,85.85 9.73,86.23 R19.2 | v80.21,29.46 80.21,30.61 79.45,31.37 IC2.59 | 10.11,83.19 v7.44,80.52
  Bottom 0.483: v80.21,29.46 79.83,29.84 67.26,29.84 65.73,31.37 23.82,31.37 7.44,47.75 v7.44,80.52
N$30  (via drill 0.3)
  Top 0.483: 74.88,7.37 71.83,7.37 R4.1 | 74.88,7.37 74.88,5.84 LED9.2 74.88,5.46 74.88,3.94 69.16,3.94 67.64,5.46 67.64,7.37 66.11,7.37 65.35,6.6 | 65.35,6.6 65.35,6.22 64.97,5.84 LED8.2 65.35,6.6 | 74.88,7.37 80.59,7.37 84.78,11.56 84.78,11.94 85.16,12.32 LED10.2 | LED7.2 54.68,3.94 50.11,3.94 46.68,7.37 45.54,7.37 45.16,6.98 45.16,6.22 44.78,5.84 LED6.2 44.4,5.46 44.02,5.08 44.02,4.7 43.25,3.94 37.16,3.94 37.16,6.98 36.78,7.37 34.49,7.37 34.49,5.84 LED5.2 34.11,5.46 33.73,5.08 33.73,4.32 33.35,3.94 28.78,3.94 28.78,5.08 26.49,7.37 v24.2,7.37 LED4.2 | v15.06,10.8 15.06,11.94 14.68,12.32 LED1.2 | v64.59,7.37 65.35,6.6
  Bottom 0.483: v15.06,10.8 18.49,7.37 v24.2,7.37 24.97,6.6 63.83,6.6 v64.59,7.37
N$31  (via drill 0.3)
  Top 0.483: R3.1 61.16,5.46 63.07,5.46 LED8.1 63.45,5.84 63.83,6.22 63.83,8.13 68.02,8.13 68.4,7.75 68.4,5.84 v72.21,5.84 72.97,5.84 LED9.1 | v81.74,12.32 83.26,12.32 LED10.1 | 32.59,8.13 28.4,8.13 | 28.4,8.13 23.82,8.13 23.06,7.37 23.06,6.22 22.68,5.84 LED4.1 | 32.59,8.13 32.59,5.84 LED5.1 | 28.4,8.13 28.4,14.22 13.92,14.22 13.54,13.84 13.54,13.08 13.16,12.7 LED1.1 | 32.59,8.13 37.16,8.13 37.92,7.37 37.92,5.84 42.49,5.84 LED6.1 42.87,5.84 42.87,8.13 47.06,8.13 49.35,5.84 v51.64,5.84 52.78,5.84 LED7.1
  Bottom 0.483: v81.74,12.32 75.26,5.84 v72.21,5.84 v51.64,5.84
N$32
  Top 0.483: 36.02,3.18 28.4,3.18 26.11,5.46 LED4.3 25.73,5.46 25.73,3.94 21.92,3.94 20.78,5.08 20.78,8.13 16.58,12.32 LED1.3 | 36.02,3.18 36.02,5.46 LED5.3 | 36.02,3.18 44.4,3.18 45.54,4.32 45.54,5.08 45.92,5.46 LED6.3 46.3,5.46 47.45,5.46 49.73,3.18 56.21,3.18 56.21,5.46 LED7.3 56.59,5.46 58.49,5.46 | 58.49,5.46 58.49,3.94 65.35,3.94 66.11,4.7 66.11,5.08 66.5,5.46 LED8.3 66.88,5.46 66.88,5.08 68.78,3.18 76.4,3.18 76.4,5.46 LED9.3 76.78,5.84 85.93,5.84 85.93,11.18 86.69,11.94 86.69,12.32 LED10.3 | 58.49,5.46 R2.1
N$33  (via drill 0.3)
  Top 0.483: 14.68,16.89 13.16,16.89 LED1.6 | 14.68,16.89 16.2,16.89 LED1.4 16.58,16.51 v16.58,14.99 | 14.68,16.89 LED1.5
  Bottom 0.483: v16.58,14.99 19.63,11.94 31.06,11.94 31.06,13.08 IC5.15
N$34  (via drill 0.3)
  Top 0.483: 24.2,9.65 22.68,9.65 LED4.6 | 24.2,9.65 25.73,9.65 LED4.4 26.11,9.65 v27.63,11.18 | 24.2,9.65 LED4.5
  Bottom 0.483: v27.63,11.18 32.21,11.18 32.21,13.08 IC5.14
N$35  (via drill 0.3)
  Top 0.483: 33.73,9.65 34.11,9.65 LED5.5 34.49,9.65 36.02,9.65 LED5.4 | 33.73,9.65 32.97,9.65 LED5.6 | 33.73,9.65 v33.73,11.18
  Bottom 0.483: v33.73,11.18 IC5.13
N$36  (via drill 0.3)
  Top 0.483: LED6.4 45.92,9.65 44.78,9.65 LED6.5 44.4,9.65 42.87,9.65 LED6.6 42.49,9.65 v42.49,11.18
  Bottom 0.483: v42.49,11.18 35.25,11.18 35.25,13.08 IC5.12
N$37  (via drill 0.3)
  Top 0.483: 54.68,9.65 53.16,9.65 LED7.6 52.78,9.27 52.78,8.89 v51.64,8.89 | 54.68,9.65 56.21,9.65 LED7.4 | 54.68,9.65 LED7.5 | v39.44,11.94 40.97,10.41 v40.97,9.65
  Bottom 0.483: v39.44,11.94 36.4,11.94 36.4,13.08 IC5.11 | v40.97,9.65 41.73,8.89 v51.64,8.89
N$38  (via drill 0.3)
  Top 0.483: LED8.4 66.5,9.65 64.97,9.65 LED8.5 64.59,9.65 63.45,9.65 LED8.6 63.07,9.27 63.07,8.13 v62.3,7.37 | v37.54,14.99 41.73,10.8 v41.73,7.37
  Bottom 0.483: v37.54,14.99 IC5.10 | v62.3,7.37 v41.73,7.37
N$39  (via drill 0.3)
  Top 0.483: LED9.4 76.4,9.65 75.26,9.65 LED9.5 74.88,9.65 73.35,9.65 LED9.6 73.35,9.27 73.35,8.89 v74.12,8.13
  Bottom 0.483: v74.12,8.13 39.44,8.13 39.44,10.03 39.83,10.41 43.25,10.41 43.25,11.56 42.11,12.7 39.44,12.7 39.06,13.08 IC5.9
N$40  (via drill 0.3)
  Top 0.483: 85.16,16.89 83.64,16.89 LED10.6 83.26,16.51 83.26,14.99 v77.93,9.65 | 85.16,16.89 86.69,16.89 LED10.4 | 85.16,16.89 LED10.5 | v44.02,11.18 v37.54,17.65
  Bottom 0.483: v37.54,17.65 IC5.7 | v44.02,11.18 45.54,9.65 v77.93,9.65
N$45
  Top 0.483: L1.1 38.68,69.09 38.68,57.28 39.44,56.52 39.44,32.13 31.44,24.13 D1.C
  Bottom 0.483: L1.1 37.16,67.56 29.92,67.56 29.54,67.18 IC8.2
N$48  (via drill 0.3)
  Top 0.483: v15.44,110.24 13.54,110.24 LED11.C | v24.97,103.76 25.73,103 26.87,103 IC6.1
  Bottom 0.483: v15.44,110.24 21.92,103.76 v24.97,103.76
N$49  (via drill 0.3)
  Top 0.483: v19.25,110.24 17.35,110.24 LED12.C | v24.97,105.28 26.11,104.14 IC6.20
  Bottom 0.483: v19.25,110.24 24.2,105.28 v24.97,105.28
N$50  (via drill 0.3)
  Top 0.483: v22.68,108.71 21.16,110.24 LED13.C | v26.11,106.43 26.87,105.66 IC6.19
  Bottom 0.483: v22.68,108.71 24.97,106.43 v26.11,106.43
N$51  (via drill 0.3)
  Top 0.483: IC3.6 29.54,36.32 26.49,36.32 R1.1 26.11,36.32 18.49,43.94 v18.49,54.61 | v13.16,58.8 13.16,62.99 12.01,64.13 10.49,64.13 JP6.2
  Bottom 0.483: v18.49,54.61 14.3,58.8 v13.16,58.8
N$52
  Top 0.483: LED14.C 24.97,110.24 28.4,106.81 IC6.18
N$53
  Top 0.483: IC6.17 29.92,109.09 28.78,110.24 LED15.C
N$54
  Top 0.483: LED16.C 32.21,110.24 31.44,109.47 31.44,107.19 IC6.16
N$55
  Top 0.483: LED17.C 36.02,110.24 34.11,110.24 34.11,109.47 33.35,108.71 32.59,108.71 32.59,107.19 IC6.15
N$56  (via drill 0.3)
  Top 0.483: v38.68,109.09 39.83,110.24 LED18.C | v34.87,108.33 33.73,107.19 IC6.14
  Bottom 0.483: v38.68,109.09 37.92,108.33 v34.87,108.33
N$57  (via drill 0.3)
  Top 0.483: v41.73,110.24 43.64,110.24 LED19.C | v36.4,106.43 35.63,105.66 IC6.13
  Bottom 0.483: v41.73,110.24 37.92,106.43 v36.4,106.43
N$58  (via drill 0.3)
  Top 0.483: v45.54,110.24 47.45,110.24 LED20.C | v37.16,104.9 36.4,104.14 IC6.12
  Bottom 0.483: v45.54,110.24 40.21,104.9 v37.16,104.9
N$59
  Top 0.483: LED21.C 51.64,110.24 57.73,104.14 63.07,104.14 63.07,103.76 63.83,103 64.97,103 IC7.1
N$60
  Top 0.483: IC7.20 64.21,104.14 62.69,105.66 60.02,105.66 55.45,110.24 LED22.C
N$61
  Top 0.483: LED23.C 59.26,110.24 63.83,105.66 64.97,105.66 IC7.19
N$62
  Top 0.483: LED24.C 63.07,110.24 66.5,106.81 IC7.18
N$63
  Top 0.483: IC7.17 68.02,109.09 66.88,110.24 LED25.C
N$64
  Top 0.483: LED26.C 70.31,110.24 69.54,109.47 69.54,107.19 IC7.16
N$65
  Top 0.483: LED27.C 74.12,110.24 72.21,110.24 72.21,109.47 71.45,108.71 70.69,108.71 70.69,107.19 IC7.15
N$66  (via drill 0.3)
  Top 0.483: v76.78,109.09 77.93,110.24 LED28.C | v72.97,108.33 71.83,107.19 IC7.14
  Bottom 0.483: v76.78,109.09 76.02,108.33 v72.97,108.33
N$67  (via drill 0.3)
  Top 0.483: v79.83,110.24 81.74,110.24 LED29.C | v74.5,106.43 73.73,105.66 IC7.13
  Bottom 0.483: v79.83,110.24 76.02,106.43 v74.5,106.43
N$68  (via drill 0.3)
  Top 0.483: v83.64,110.24 85.55,110.24 LED30.C | v75.26,104.9 74.5,104.14 IC7.12
  Bottom 0.483: v83.64,110.24 78.31,104.9 v75.26,104.9
N$71  (via drill 0.3)
  Top 0.483: v15.44,56.52 15.44,55.75 15.82,55.37 R18.1 | v11.63,56.13 10.49,54.99 LAUNCH-CONTROL.1 | v77.54,32.13 78.69,30.99 IC2.58
  Bottom 0.483: v15.44,56.52 15.06,56.13 13.92,56.13 | v11.63,56.13 13.92,56.13 | v77.54,32.13 30.68,32.13 18.49,44.32 14.3,44.32 13.92,44.7 13.92,56.13
N$72  (via drill 0.3)
  Top 0.483: v31.44,100.33 31.44,98.81 IC6.6 | v66.88,100.33 66.88,98.81 IC7.4
  Bottom 0.483: v66.88,100.33 v31.44,100.33
N$74
  Top 0.483: 71.83,97.28 74.88,97.28 R5.1 | IC7.8 71.83,97.28 | 71.83,97.28 71.83,96.9 69.92,96.9 69.54,97.28 69.54,98.42 IC7.6
N$75  (via drill 0.3)
  Top 0.483: v64.21,98.42 64.21,98.04 63.45,97.28 R6.1 | v73.73,98.42 74.88,98.42 R5.2 75.26,98.81 75.26,101.47 73.73,101.47 IC7.10
  Bottom 0.483: v73.73,98.42 v64.21,98.42
N$76
  Top 0.483: IC6.8 33.73,97.28 37.54,97.28 R9.1
N$80
  Top 0.483: R7.2 47.45,102.23 LED2.3
N$87
  Top 0.483: R10.2 47.45,106.05 LED2.1
N$88
  Top 0.483: R8.2 7.82,87.38 7.82,88.9 LAUNCHCONTROL-LED.A
N$89  (via drill 0.3)
  Top 0.483: v7.82,82.8 7.82,85.47 R8.1 | v79.07,38.23 79.45,37.85 79.83,37.85 80.21,38.23 IC2.4
  Bottom 0.483: v7.82,82.8 7.82,81.28 11.63,77.47 11.63,59.56 42.87,59.56 45.92,62.61 60.02,62.61 79.07,43.56 v79.07,38.23
N$94  (via drill 0.6)
  other vias: 9.6,101.6
N$95  (via drill 0.6)
  other vias: 89.61,101.6
N$96  (via drill 0.6)
  other vias: 49.6,53.98
N$97  (via drill 0.6)
  other vias: 49.6,19.05
PADDLE-DOWN  (via drill 0.3)
  Top 0.483: R12.2 v14.68,45.09 11.63,45.09 PADDLESHIFT.3 | v76.4,38.99 77.93,40.51 IC2.8
  Bottom 0.483: v76.4,38.99 75.64,38.23 25.73,38.23 18.87,45.09 v14.68,45.09
PADDLE-UP  (via drill 0.3)
  Top 0.483: PADDLESHIFT.2 14.3,43.18 | 14.3,43.18 R13.2 | v75.26,38.99 77.54,41.27 IC2.9 | v52.4,38.99 28.4,14.99 17.35,14.99 17.35,19.18 13.16,23.37 13.16,39.37 14.3,40.51 14.3,43.18
  Bottom 0.483: v52.4,38.99 v75.26,38.99
PE  (via drill 0.3)
  Top 0.483: 17.35,45.09 17.35,43.18 | 17.35,45.09 17.35,52.32 14.68,54.99 R18.2 | 17.35,45.09 R12.1 | 16.2,24.13 18.11,22.23 18.11,16.51 28.01,16.51 C9.2 | 17.35,43.18 16.2,42.04 16.2,31.37 | 16.2,24.13 16.2,31.37 | 17.35,43.18 R13.1 | 16.2,24.13 D1.A | 83.26,31.75 83.64,32.13 C6.2 | 83.26,31.75 82.88,31.37 C19.2 | 84.78,31.75 84.02,31.75 C6.2 | 84.78,31.75 88.59,31.75 89.74,32.89 R20.1 | 83.26,31.75 83.26,32.13 81.74,33.66 IC2.63 | 83.26,31.75 C6.2 | 84.78,25.65 87.07,25.65 UART1.3 | 84.78,31.75 84.78,25.65 | R21.2 61.16,16.51 63.45,16.51 R22.2 63.83,16.51 66.11,16.51 | 73.73,16.51 71.45,16.51 R25.2 71.07,16.51 68.78,16.51 R24.2 68.4,16.51 66.11,16.51 | 66.11,16.51 R23.2 | 77.54,16.51 78.69,16.51 R28.2 | 77.54,16.51 76.4,16.51 R27.2 76.02,16.51 73.73,16.51 | 77.54,16.51 77.54,22.61 | 77.54,22.61 77.54,26.42 76.02,27.94 IC2.53 75.64,28.32 75.26,28.7 75.26,35.56 v69.16,41.66 68.4,42.42 IC2.22 | 73.73,16.51 R26.2 | 84.78,25.65 81.74,22.61 77.54,22.61 | C10.2 31.82,63.75 34.11,63.75 v34.11,62.99 34.11,55.37 C3.- | C5.2 37.54,34.8 35.25,34.8 IC3.2 | 34.49,34.8 34.87,35.18 IC3.2 | 34.49,34.8 33.73,34.04 33.73,33.66 IC3.8 29.54,33.66 29.54,31.37 16.2,31.37 | 34.49,34.8 32.97,36.32 32.97,43.94 34.11,45.09 C4.- | 34.49,34.8 IC3.2 | 37.16,100.71 37.16,99.19 37.54,98.81 R9.2 | 37.16,100.71 36.4,101.47 35.63,101.47 IC6.10 35.25,101.47 28.01,101.47 | 28.01,101.47 28.4,101.09 28.4,98.81 IC6.4 28.4,98.42 v21.54,98.42 | 28.01,101.47 27.25,101.47 IC6.2 | 63.45,101.09 63.45,99.19 61.54,97.28 R6.2 | 63.45,101.09 63.83,101.47 64.97,101.47 IC7.2 | 51.64,104.14 51.64,105.66 LED2.6 51.26,106.05 51.26,107.19 40.97,107.19 40.59,106.81 40.59,104.14 37.16,100.71
  Top 0.483: 60.02,102.62 60.02,102.23 C8.2 60.02,102.62 | 60.02,102.62 59.26,103.38 57.35,103.38 57.35,102.23 C7.2 51.64,102.23 LED2.4 51.64,102.62 51.64,104.14 | 51.64,104.14 LED2.5 | v63.07,101.09 63.45,101.09 | 60.02,102.62 v60.78,103.38 | R19.1 11.25,86.61 11.25,88.9 LAUNCHCONTROL-LED.C 10.87,88.9 9.35,90.42 5.92,90.42 5.92,88.14 2.49,84.71 2.49,74.04 9.35,67.18 | 9.35,67.18 10.11,66.42 JP6.3 10.49,66.04 13.16,66.04 v13.16,65.28 | 9.35,67.18 9.35,67.56 10.11,68.33 JP6.4
  Bottom 0.483: 34.49,19.94 34.87,19.94 IC5.5 | 34.49,19.94 33.73,19.94 IC5.4 33.73,18.03 22.3,18.03 16.2,24.13 D1.A | 34.49,19.94 35.63,21.08 38.68,21.08 38.68,19.94 IC5.8 | 64.59,42.42 65.73,43.56 66.11,43.56 C1.1 66.5,43.56 67.26,43.56 v69.16,41.66 | 64.59,42.42 64.21,42.04 C2.1 | 64.59,42.42 61.92,45.09 44.4,45.09 | C4.- 44.4,45.09 | 44.4,45.09 34.49,54.99 C3.- | v60.78,103.38 v63.07,101.09 | R17.2 93.17,51.56 93.17,53.09 R16.2 93.17,53.47 93.17,54.99 R15.2 93.17,55.37 93.17,56.9 R14.2 92.78,57.28 89.74,60.33 88.59,60.33 86.69,62.23 86.69,63.37 | 86.69,63.37 86.69,67.18 U$9.GND | 46.68,84.33 46.68,82.04 MAX7221.GND1 | 46.68,84.33 51.26,84.33 52.78,82.8 MAX7221.GND | IC8.6 21.54,64.9 | 21.54,64.9 23.82,62.61 28.78,62.61 29.16,62.23 IC8.5 29.54,62.23 33.35,62.23 v34.11,62.99 34.49,63.37 86.69,63.37 | 21.54,64.9 28.78,64.9 29.16,65.28 IC8.3 | 21.16,65.28 IC8.6 | 46.68,84.33 45.92,85.09 20.78,85.09 16.58,80.9 | 16.58,80.9 12.39,76.71 12.39,65.66 13.16,65.66 | 13.16,65.66 20.78,65.66 IC8.6 | 13.16,65.66 v13.16,65.28 | v21.54,98.42 14.68,91.57 14.68,80.9 16.58,80.9
RESET  (via drill 0.3)
  Top 0.483: v74.12,52.7 68.78,47.37 68.78,44.32 69.16,43.94 IC2.20 | v84.02,62.61 86.31,64.9 86.31,67.18 U$9.RST
  Bottom 0.483: v84.02,62.61 v74.12,52.7
RGB-BLUE-ON/OFF  (via drill 0.3)
  Top 0.483: v58.49,45.85 R2.2 | v69.92,46.61 71.07,45.47 IC2.17
  Bottom 0.483: v58.49,45.85 59.26,46.61 v69.92,46.61
RGB-GREEN-ON/OFF  (via drill 0.3)
  Top 0.483: v59.26,47.37 59.26,8.89 60.78,7.37 R3.2 | v72.97,47.37 73.73,46.61 73.73,45.47 IC2.16
  Bottom 0.483: v72.97,47.37 v59.26,47.37
RGB-RED-ON/OFF
  Top 0.483: R4.2 71.83,9.27 65.73,15.37 60.02,15.37 60.02,43.56 73.35,56.9 73.35,64.52 73.73,64.9 74.88,64.9 74.88,45.47 74.5,45.09 IC2.15
RGB-STATUS-LED-A  (via drill 0.3)
  Top 0.483: v67.26,27.94 67.26,28.7 67.64,29.08 IC2.42
  Bottom 0.483: v67.26,27.94 67.26,29.08 66.88,29.08 66.5,29.46 31.82,29.46 27.63,25.27 27.63,19.94 29.92,19.94 IC5.1
RGB-STATUS-LED-B  (via drill 0.3)
  Top 0.483: v66.11,28.7 66.88,29.46 IC2.41
  Bottom 0.483: v66.11,28.7 32.21,28.7 28.4,24.89 28.4,21.08 30.68,21.08 31.06,20.7 31.06,19.94 IC5.2
RGB-STATUS-LED-C  (via drill 0.3)
  Top 0.483: v64.21,27.94 66.5,30.23 IC2.40
  Bottom 0.483: v64.21,27.94 40.59,27.94 33.73,21.08 32.97,21.08 32.59,20.7 32.59,19.94 IC5.3
RPM-PWM  (via drill 0.3)
  Top 0.483: C8.1 61.92,102.23 61.92,100.33 R30.2 61.54,100.33 61.16,99.95 61.16,98.81 60.4,98.04 | 60.4,98.04 60.4,96.52 60.78,96.14 66.5,96.14 68.02,97.66 IC7.5 | v30.3,100.33 30.3,99.19 29.92,98.81 IC6.5 | 60.4,98.04 v59.26,99.19
  Bottom 0.483: v30.3,100.33 31.44,99.19 v59.26,99.19
RPM-PWM-OUT  (via drill 0.3)
  Top 0.483: v57.73,98.42 57.73,99.95 57.35,100.33 R29.1 | v75.64,66.8 75.64,45.09 74.88,44.32 IC2.14
  Bottom 0.483: v57.73,98.42 58.49,97.66 76.4,97.66 84.4,89.66 84.4,74.04 82.88,74.04 v75.64,66.8
RS-BINARY-1  (via drill 0.3)
  Top 0.483: v90.5,50.42 89.36,51.56 87.83,51.56 ROTARY-SWITCH.4 | v80.97,24.13 76.78,28.32 IC2.54
  Bottom 0.483: R17.1 91.26,51.18 v90.5,50.42 90.5,26.42 88.21,24.13 v80.97,24.13
RS-BINARY-2  (via drill 0.3)
  Top 0.483: v84.78,52.7 87.45,52.7 87.45,53.47 ROTARY-SWITCH.3 | v76.02,32.89 76.02,30.23 76.78,29.46 IC2.55
  Bottom 0.483: v84.78,52.7 85.55,52.7 | 85.55,52.7 90.88,52.7 91.26,53.09 R16.1 | v76.02,32.89 84.02,40.89 85.16,40.89 85.55,41.27 85.55,52.7
RS-BINARY-3  (via drill 0.3)
  Top 0.483: v90.12,54.61 87.83,54.61 87.83,55.37 ROTARY-SWITCH.2 | v83.26,48.89 83.26,35.56 79.83,35.56 76.78,32.51 76.78,30.61 77.54,29.84 IC2.56
  Bottom 0.483: R15.1 91.26,54.99 90.88,54.61 v90.12,54.61 83.26,54.61 v83.26,48.89
RS-BINARY-4  (via drill 0.3)
  Top 0.483: 88.59,58.42 87.83,57.66 ROTARY-SWITCH.1 | 88.59,58.42 v88.97,58.8 | v80.21,26.04 80.21,28.32 78.31,30.23 IC2.57 | v87.45,23.37 90.88,26.8 90.88,43.94 90.5,44.32 90.5,49.28 91.26,50.04 91.26,55.75 88.59,58.42
  Bottom 0.483: v88.97,58.8 89.74,58.8 91.26,57.28 R14.1 | v80.21,26.04 80.21,23.37 v87.45,23.37
RXCAN  (via drill 0.3)
  Top 0.483: v63.83,36.32 63.83,36.7 63.45,37.08 IC2.31 | v36.4,37.08 35.25,37.08 35.25,37.47 IC3.4
  Bottom 0.483: v63.83,36.32 63.07,37.08 v36.4,37.08
RXD1  (via drill 0.3)
  Top 0.483: v73.73,29.08 73.73,31.37 65.73,39.37 IC2.27
  Bottom 0.483: v73.73,29.08 74.88,27.94 UART1.2
SHIFT-LIGHT-BLUE  (via drill 0.3)
  Top 0.483: v42.49,86.61 42.49,95 42.11,95.38 42.11,102.23 R7.1 | v50.49,85.85 50.87,85.47 50.87,74.04 67.64,57.28 v67.64,52.32 | v78.31,38.99 78.69,38.99 79.07,39.37 IC2.6
  Bottom 0.483: v42.49,86.61 43.25,85.85 v50.49,85.85 | v67.64,52.32 71.83,48.13 73.35,48.13 78.31,43.18 v78.31,38.99
SHIFT-LIGHT-GREEN  (via drill 0.3)
  Top 0.483: v42.49,104.9 42.49,105.66 42.11,106.05 R10.1 | v85.16,74.8 80.59,70.23 80.59,39.75 80.21,39.37 IC2.5
  Bottom 0.483: v42.49,104.9 43.25,104.14 71.07,104.14 85.16,90.04 v85.16,74.8
TC-TEMP-ON/OFF  (via drill 0.3)
  Top 0.483: 87.83,35.56 87.83,37.08 TRACKTION-CONTROL.1 | 87.83,35.56 87.83,33.27 R20.2 | v79.83,41.27 79.07,40.51 IC2.7 | v84.78,41.66 84.78,38.61 87.83,35.56
  Bottom 0.483: v79.83,41.27 80.21,41.66 v84.78,41.66
TXCAN  (via drill 0.3)
  Top 0.483: v64.59,35.56 64.59,37.08 63.83,37.85 IC2.30 | v36.4,34.04 35.25,34.04 35.25,33.66 IC3.1
  Bottom 0.483: v64.59,35.56 63.07,34.04 v36.4,34.04
TXD1  (via drill 0.3)
  Top 0.483: v72.97,30.99 64.97,38.99 IC2.28
  Bottom 0.483: v72.97,30.99 73.35,30.61 87.07,30.61 UART1.1
VCC  (via drill 0.3)
  Top 0.483: 10.49,71.37 v13.16,71.37 | 10.49,71.37 10.49,72.14 JP6.6 | 10.49,71.37 10.49,70.61 JP6.5 | C3.+ 30.3,54.23 v30.3,69.85
  Bottom 0.483: v13.16,71.37 26.87,71.37 29.16,69.09 IC8.1 29.54,69.09 v30.3,69.85